# Altium PCB hexbot_通信板.PcbDoc
Units mil, origin at the board's own origin, x right, y up, seen from the top; angles counter-clockwise.
Board outline 3147.8 x 2730 mil, 2 copper layers (Top Layer, Bottom Layer); 27 components, 29 nets, 120 pads, 10 vias.
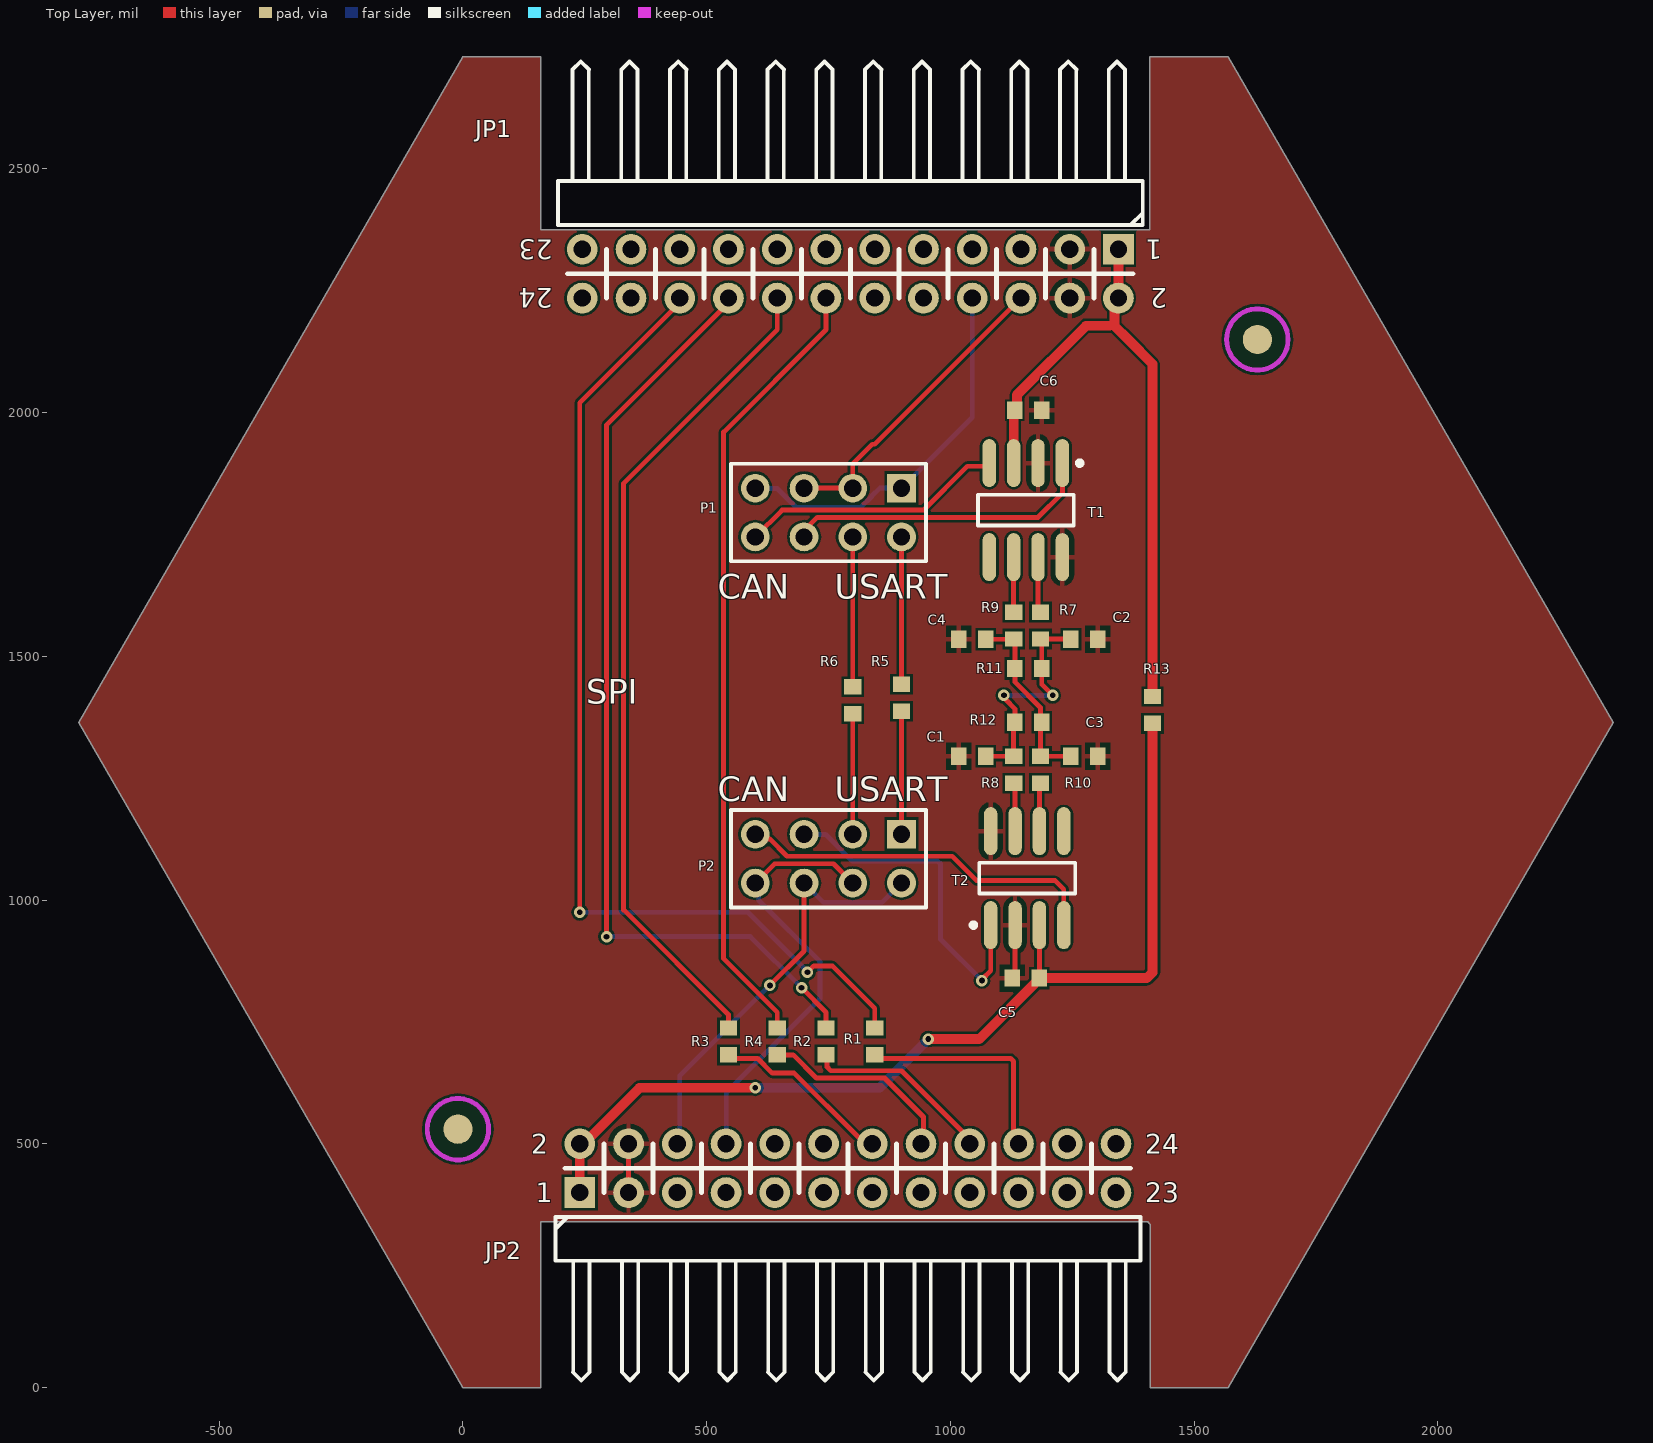
[diagram p0: Top Layer view]
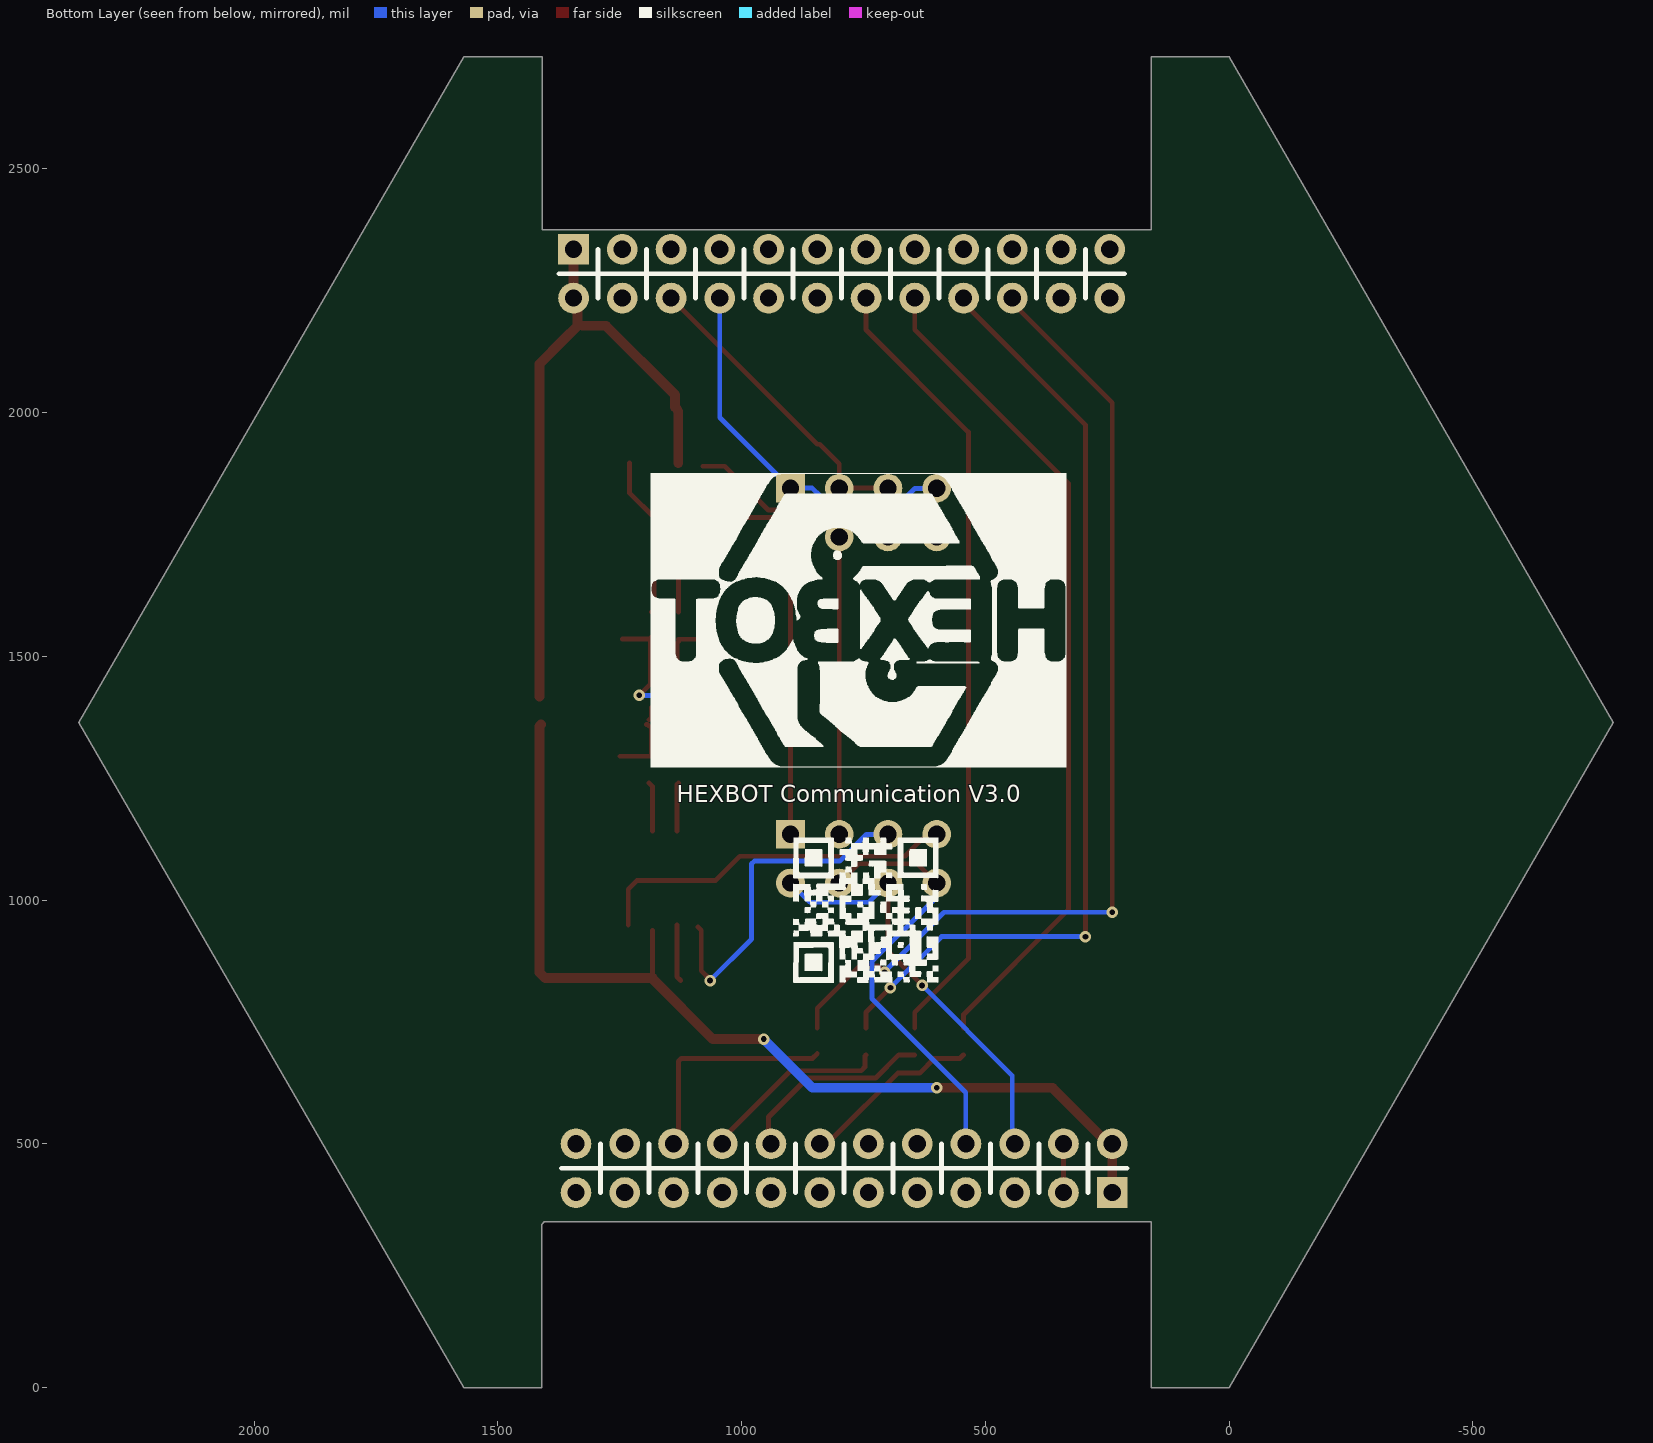
[diagram p1: Bottom Layer view, seen from below]

## Layer stack, top to bottom
Top Solder: solder mask 0.4, Solder Resist, Dk 3.5
Top Layer: signal copper 1.4
Dielectric 1: dielectric 12.6, FR-4, Dk 4.8
Bottom Layer: signal copper 1.4
Bottom Solder: solder mask 0.4, Solder Resist, Dk 3.5

## Board outline
0,0 -787.8,1364.61 0,2730 -0.29,2729.53 159.71,2729.53 159.71,2375 1409.71,2375 1409.71,2729.53 1569.71,2729.53 1570,2730 2360,1364.61 1570,0 1410,0 1410,335 1405,340 160,340 160,0

## Design rules (kind name [scope] priority, off if disabled: settings)
Clearance [All] p1: gap=5 ignorepadtopadclearanceinfootprint=TRUE
PolygonConnect [All] p1: connectstyle=Relief reliefconductorwidth=10 reliefentries=4 polygonreliefangle="90 Angle" airgapwidth=10
RoutingVias [All] p1: holewidth=28 width=50 viastyle="Through Hole" minholewidth=28 minwidth=50 maxholewidth=28 maxwidth=50
SolderMaskExpansion [All] p1: expansion=4 istentingtop=FALSE
Width [All] p1: maxlimit=40 minlimit=10 preferedwidth=10 minimp=50.000000 maximp=50.000000 favimp=50.000000
30 further rules are at their usual default settings.

## Components (designator, comment, footprint, x,y, rotation, side; value= is the part's Value field where it differs from the comment)
C1 "100NF" 1608[0603] 1045,1295 r180 top
C2 "100NF" 1608[0603] 1275,1535 r0 top
C3 "100PF" 1608[0603] 1275,1295 r180 top
C4 "100PF" 1608[0603] 1045,1535 r0 top
C5 "100NF" 1608[0603] 1155,840 r0 top
C6 "100NF" 1608[0603] 1160,2005 r180 top
JP1 "Header 2X11" HDR2.54-WI-2x12P 795,2285 r180 top
JP2 "Header 2X11" HDR2.54-WI-2x12P 790,450 r0 top
mark1 "Mark" Mark#1 1630,2150 r90 top
Mark1 "Mark" Mark#2 -10,530 r90 top
P1 "Header 4X2" HDR2X4 900,1845 r180 top
P2 "Header 4X2" HDR2X4 900,1135 r180 top
R1 "22R" 1608[0603] 845,710 r90 top value=50
R2 "22R" 1608[0603] 745,710 r90 top value=50
R3 "22R" 1608[0603] 545,710 r90 top value=50
R4 "22R" 1608[0603] 645,710 r90 top
R5 "51R" 1608[0603] 900,1415 r90 top
R6 "51R" 1608[0603] 800,1410 r90 top
R7 "0R" 1608[0603] 1185,1563.25 r270 top
R8 "0R" 1608[0603] 1130,1267.44 r270 top
R9 "0R" 1608[0603] 1130,1563.25 r270 top
R10 "0R" 1608[0603] 1185,1267.44 r270 top
R11 "100R" 1608[0603] 1160,1475 r0 top
R12 "100R" 1608[0603] 1160,1365 r180 top
R13 "Res2" 1608[0603] 1415,1390 r270 top value=1K
T1 "TJA1050" SO8_M 1155,1800 r270 top
T2 "TJA1050" SO8_M 1157.91,1045 r90 top

## Footprints (in the part's own frame and the unit in brackets; to place one, negate y for a bottom-side part, rotate by r counter-clockwise, add the part's x,y. Pads: shape width x height; smd on the part's side, far side on the other; paste and mask are expansions set on the pad)
1608[0603] [mm] "Chip Capacitor, Body 1.6x0.8mm, IPC High Density"
  rect 0.8x0.9 smd: 1(-0.7,0) 2(0.7,0)
  body extent -0.87,-0.48 0.87,0.48, height 1.3
HDR2.54-WI-2x12P [mm] "双排弯脚排针，12x2脚  淘宝ID:黄晶宝石   店铺网址:https://shop463601444.taobao.com"
  rect 1.6x1.6 hole 0.9: 1(-13.97,-1.27)
  round 1.6 hole 0.9: 2(-13.97,1.27) 3(-11.43,-1.27) 4(-11.43,1.27) 5(-8.89,-1.27) 6(-8.89,1.27) 7(-6.35,-1.27) 8(-6.35,1.27) 9(-3.81,-1.27) 10(-3.81,1.27) 11(-1.27,-1.27) 12(-1.27,1.27) 13(1.27,-1.27) 14(1.27,1.27) 15(3.81,-1.27) 16(3.81,1.27) 17(6.35,-1.27) 18(6.35,1.27) 19(8.89,-1.27) 20(8.89,1.27) 21(11.43,-1.27) 22(11.43,1.27) 23(13.97,-1.27) 24(13.97,1.27)
  silkscreen extent -15.24,-11.06 15.24,1.27, body extent -15.24,-11.23 15.24,1.62, height 5.1
HDR2X4 [mm] "Connector; Header; 4x2 Position"
  rect 1.5x1.5 hole 0.9: 1(0,0)
  round 1.5 hole 0.9: 2(0,2.54) 3(2.54,0) 4(2.54,2.54) 5(5.08,0) 6(5.08,2.54) 7(7.62,0) 8(7.62,2.54)
  silkscreen extent -1.27,-1.27 8.89,3.81
Mark#1 [mil]
  round 60 smd mask+4: mark(0,0)
  Top Layer keep-out circle w10: c0,0 r62.99
Mark#2 [mil]
  round 60 smd mask+39.37: mark(0,0)
  Top Layer keep-out circle w10: c0,0 r62.99
SO8_M [mm] "SOIC, 8-Leads, Body 4.9x3.9mm, Pitch 1.27mm, IPC Low Density"
  oval 2.5x0.7 smd: 1(-2.45,1.905) 2(-2.45,0.635) 3(-2.45,-0.635) 4(-2.45,-1.905) 5(2.45,-1.905) 6(2.45,-0.635) 7(2.45,0.635) 8(2.45,1.905)
  silkscreen extent -2.57,-2.5 0.8,2.93, body extent -2,-2.5 2,2.5, height 1.75

## Part data
C1 C2 C3 C4 C5 C6: library part Cap, "Capacitor", LatestRevisionDate=17-Jul-2002, LatestRevisionNote="Re-released for DXP Platform.", PackageDescription="Radial Cap, Thru-Hole; 2 Leads; 0.3 in Pin Spacing", PackageReference=RAD-0.3, Published=8-Jun-2000, Publisher="Altium Limited"
JP1 JP2: library part "Header 12X2", "12*2P接插件", BOM名称=12*2P接插件, 学习资源=https://shop463601444.taobao.com, 版权归属="封装库来自淘宝卖家 ID：黄晶宝石"
P1 P2: "Header, 4-Pin, Dual row", LatestRevisionDate=17-Jul-2002, LatestRevisionNote="Re-released for DXP Platform.", Publisher="Altium Limited"
R1 R2 R3 R4 R5 R6 R7 R8 R9 R10 R11 R12: library part Res2, "Resistor", LatestRevisionDate=17-Jul-2002, LatestRevisionNote="Re-released for DXP Platform.", PackageDescription="Axial Device, Thru-Hole; 2 Leads; 0.4 in Pin Spacing", PackageReference=AXIAL-0.4, Published=8-Jun-2000, Publisher="Altium Limited"
R13: "Resistor", LatestRevisionDate=17-Jul-2002, LatestRevisionNote="Re-released for DXP Platform.", PackageDescription="Axial Device, Thru-Hole; 2 Leads; 0.4 in Pin Spacing", PackageReference=AXIAL-0.4, Published=8-Jun-2000, Publisher="Altium Limited"

## Via types
v1: diameter 23.62, hole 11.81, Top Layer to Bottom Layer, 10 vias

## Nets (pads, with @x,y where several pads share a name; then routed paths per layer and width w, separated by ;. In a path a pad name is that pad's centre, name@x,y a point inside that pad or via, vN(x,y) a via of type N, cw(c..) or ccw(c..) an arc to the next point about the centre after c; other vN are vias at no path point)
+5: C6.2 JP1.1 JP1.2 R13.1 T1.3 | length 1343.6
  Top Layer w10: C6.2@1130,2002.56 C6.2
  Top Layer w20: T1.3 C6.2@1130,2002.56 ; C6.2 1132.44,2006.97 1136.67,2011.19 1136.67,2036.67 1278.03,2178.03 1326.97,2178.03 ; JP1.2 1336.77,2226.77 1336.77,2178.03 1365.1,2149.7 1415,2099.8 R13.1 ; JP1.1 1345,2240 JP1.2@1347.5,2237.5
+5_1: C5.2 JP2.1 JP2.2 R13.2 T2.3 | length 2019.6
  Top Layer w10: C5.2 1182.91,840.35 T2.3@1182.91,937.91
  Top Layer w20: JP2.1 JP2.2@240,495 ; JP2.2 247.5,500 362.5,615 v1(600,615) ; v1(955,715) 1059.53,715 1182.56,838.03 C5.2 1403.28,840 1415,851.72 1415,1356.69 R13.2@1411.69,1360
  Bottom Layer w20: v1@605,615 855,615 v1(955,715)
"CAN0 RX": P1.8 T1.4 | length 540.1
  Top Layer w10: P1.8 655,1800 945,1800 1035,1890 T1.4@1080,1890
"CAN0 TX": P1.6 T1.1 | length 636.3
  Top Layer w10: P1.6 700,1757.97 727.03,1785 1180,1785 1230,1835 T1.1
"CAN1 RX": P2.7 T2.4 | length 753.2
  Top Layer w10: P2.7 609.39,1125.61 629.39,1125.61 665,1090 1004.14,1090 1010,1084.14 1054.14,1040 1215,1040 1232.91,1022.09 T2.4
"CAN1 TX": P2.5 T2.1 | length 700.3
  Top Layer w10: v1(1065,835) 1065,837.09 1082.91,855 1082.91,937.91 T2.1@1090,945
  Bottom Layer w10: P2.5 700.43,1134.57 744.53,1134.57 799.1,1080 974.14,1080 980,1074.14 980,920 v1@1065.25,834.76
CAN_H: C1.1 C2.1 R7.2 R8.1 R11.2 R12.2 | length 465.9
  Top Layer w10: C1.1 R8.1@1125,1295 ; v1@1114.6,1410.4 1132.44,1392.56 R12.2 ; R8.1 R12.2@1130,1365 ; R7.2 R7.2@1187.56,1535.69 ; R7.2@1185,1540 1187.56,1537.44 R7.2@1187.56,1535.69 ; v1(1210,1420) 1187.56,1442.44 R11.2 R7.2@1187.56,1535.69 ; C2.1@1245,1535 1244.31,1535.69 R7.2@1187.56,1535.69
  Bottom Layer w10: v1(1110,1420) v1(1210,1420)
CAN_L: C3.2 C4.2 R9.2 R10.1 R11.1 R12.1 | length 377.8
  Top Layer w10: C4.2 R9.2@1130,1535 ; R9.2@1130,1530 1132.44,1527.56 R11.1 1132.44,1447.56 1185,1395 1185,1375 R12.1@1190,1370 ; R12.1@1195,1360 1192.72,1360 1185,1352.28 R10.1 C3.2@1250,1295
GND: C1.2 C2.2 C3.1 C4.1 C5.1 C6.1 JP1.3 JP1.4 JP2.3 JP2.4 T1.2 T1.8 T2.2 T2.8 | length 223.9
  Top Layer w10: JP2.4@335,505 JP2.4 JP2.3 ; C5.1@1125,835 1132.91,842.91 T2.2
NetR7_1: R7.1 T1.7 | length 81.3
  Top Layer w10: T1.7@1180,1670 1180,1595.81 R7.1
NetR8_2: R8.2 T2.7 | length 99.8
  Top Layer w10: R8.2@1130,1240 1132.91,1237.09 T2.7
NetR9_1: R9.1 T1.6 | length 86.3
  Top Layer w10: R9.1 1130,1670 T1.6@1135,1675
NetR10_2: R10.2 T2.6 | length 101.5
  Top Layer w10: T2.6 1182.91,1232.91 R10.2@1190,1240
P009: JP1.8 P1.1 P1.7 | length 778.1
  Bottom Layer w10: P1.7 600.43,1844.57 644.53,1844.57 683.63,1805.47 816.37,1805.47 839.53,1828.63 839.53,1829.06 855.47,1845 P1.1@895,1845 ; P1.1 1045,1990 JP1.8
P010: JP1.6 P1.3 P1.5 | length 630.8
  Top Layer w10: P1.5 P1.3 ; P1.3@800,1850 800,1895 840,1935 845,1935 JP1.6
P109: JP2.8 P2.4 P2.8 | length 905.6
  Top Layer w10: P2.8 639.53,1074.53 760.47,1074.53 795,1040 P2.4@800,1040
  Bottom Layer w10: JP2.8@540.38,495 540.38,605.38 733.11,798.11 733.11,873.11 607.09,999.12 607.09,1027.91 P2.8
P110: JP2.6 P2.2 P2.6 | length 876.4
  Top Layer w10: v1(630,825) 700,895 P2.6
  Bottom Layer w10: JP2.6@445,497.01 445,640 v1(630,825) ; P2.6 739.53,995.47 860.47,995.47 P2.2
"SPI0 MISO": JP1.16 R3.2 | length 1727
  Top Layer w10: R3.2 545,765 330,980 330,1855 645,2170 JP1.16 JP1.16@645,2245
"SPI0 MOSI": JP1.14 R4.2 | length 1630
  Top Layer w10: R4.2 645,770 535,880 535,1960 745,2170 JP1.14
"SPI0 NSS": JP1.20 R1.2 | length 2083.8
  Top Layer w10: v1(240,975) 240,2020 JP1.20@452.48,2232.48 ; v1(707.08,852.08) 720,865 758.09,865 845,778.09 R1.2
  Bottom Layer w10: v1(240,975) 585,975 707.08,852.92 v1(707.08,852.08)
"SPI0 SCK": JP1.18 R2.2 | length 1957.3
  Top Layer w10: v1(295,925) 295,1975 JP1.18@550,2230 ; v1(695,820) 745,770 R2.2
  Bottom Layer w10: v1(295,925) 590,925 v1(695,820)
"SPI1 MISO": JP2.16 R4.1 | length 412.8
  Top Layer w10: R4.1 677.56,682.44 725,635 865,635 945,555 JP2.16@945,495
"SPI1 MOSI": JP2.14 R3.1 | length 370.6
  Top Layer w10: R3.1 552.44,675 604.83,675 634.83,645 680,645 809.62,515.38 810.28,515.38 825.66,500 JP2.14
"SPI1 NSS": JP2.20 R1.1 | length 462.8
  Top Layer w10: R1.1@845,685 855,675 1124.14,675 1130,669.14 1130,505 JP2.20@1135,500
"SPI1 SCK": JP2.18 R2.1 | length 379.6
  Top Layer w10: R2.1 747.45,679.99 747.45,657.55 755,650 900,650 JP2.18@1040,510
"USART0 RX": P1.4 R6.2 | length 307.4
  Top Layer w10: R6.2 P1.4
"USART0 TX": P1.2 R5.2 | length 307.4
  Top Layer w10: R5.2 P1.2 P1.2@900,1750
"USART1 RX": P2.1 R5.1 | length 254.5
  Top Layer w10: R5.1 900,1140 P2.1@905,1135
"USART1 TX": P2.3 R6.1 | length 250
  Top Layer w10: P2.3 R6.1@800,1385
pads on no net: JP1.5 JP1.7 JP1.9 JP1.10 JP1.11 JP1.12 JP1.13 JP1.15 JP1.17 JP1.19 JP1.21 JP1.22 JP1.23 JP1.24 JP2.5 JP2.7 JP2.9 JP2.10 JP2.11 JP2.12 JP2.13 JP2.15 JP2.17 JP2.19 JP2.21 JP2.22 JP2.23 JP2.24 mark1.mark Mark1.mark T1.5 T2.5

## Polygon pours and split planes (outlines as drawn)
GND on Top Layer "Top Layer-No Net1" (solid, remove dead copper, pour order 5): 0,0 -787.8,1364.61 0,2730 -0.29,2729.53 159.71,2729.53 159.71,2375 1409.71,2375 1409.71,2729.53 1569.71,2729.53 1570,2730 2360,1364.61 1570,0 1410,0 1410,335 1405,340 160,340 160,0
GND on Top Layer "Top Layer-No Net" (solid, remove dead copper, pour order 4): 0,0 -787.8,1364.61 0,2730 -0.29,2729.53 159.71,2729.53 159.71,2375 1409.71,2375 1409.71,2729.53 1569.71,2729.53 1570,2730 2360,1364.61 1570,0 1410,0 1410,335 1405,340 160,340 160,0

## Silkscreen, mask and mechanical layers (free items; w line width, h text height)
Top Overlay:
  text "CAN" at 523,1618 h50
  text "USART" at 763,1618 h50
  text "SPI" at 253,1403 h50
  text "CAN" at 523,1203 h50
  text "USART" at 763,1203 h50
Bottom Overlay:
  drawing of 3021 lines, arcs and shapes, not listed
  text "HEXBOT Communication V3.0" at 1133.5,1189.63 h59.06
Mechanical 1:
  lines w10: -0.29,2729.53 159.71,2729.53 159.71,2375 1409.71,2375 1409.71,2729.53 1569.71,2729.53 ; 0,2730 -787.8,1364.61 0,0 160,0 160,340 1405,340 1410,335 1410,0 1570,0 2360,1364.61 1570,2730

## Text inside footprints (layer, text, board x,y; h text height)
JP1: Top Overlay "24" at 185,2255 h40 r180; Top Overlay "23" at 185,2355 h40 r180; Top Overlay "2" at 1445,2255 h40 r180; Top Overlay "1" at 1435,2355 h40 r180
JP2: Top Overlay "24" at 1400,480 h40; Top Overlay "23" at 1400,380 h40; Top Overlay "2" at 140,480 h40; Top Overlay "1" at 150,380 h40